# Altium PCB IntelliModule-Alpha.PcbDoc (part 1 of 2)
Units mm, origin at the board's own origin, x right, y up, seen from the top; angles counter-clockwise.
Board outline 30 x 26.8 mm, 4 copper layers (Top Layer, Layer 1, Layer 2, Bottom Layer), stack 1.006 mm thick; 64 components, 69 nets, 256 pads, 140 vias.
Unrouted connection lines stored in the file: 2.
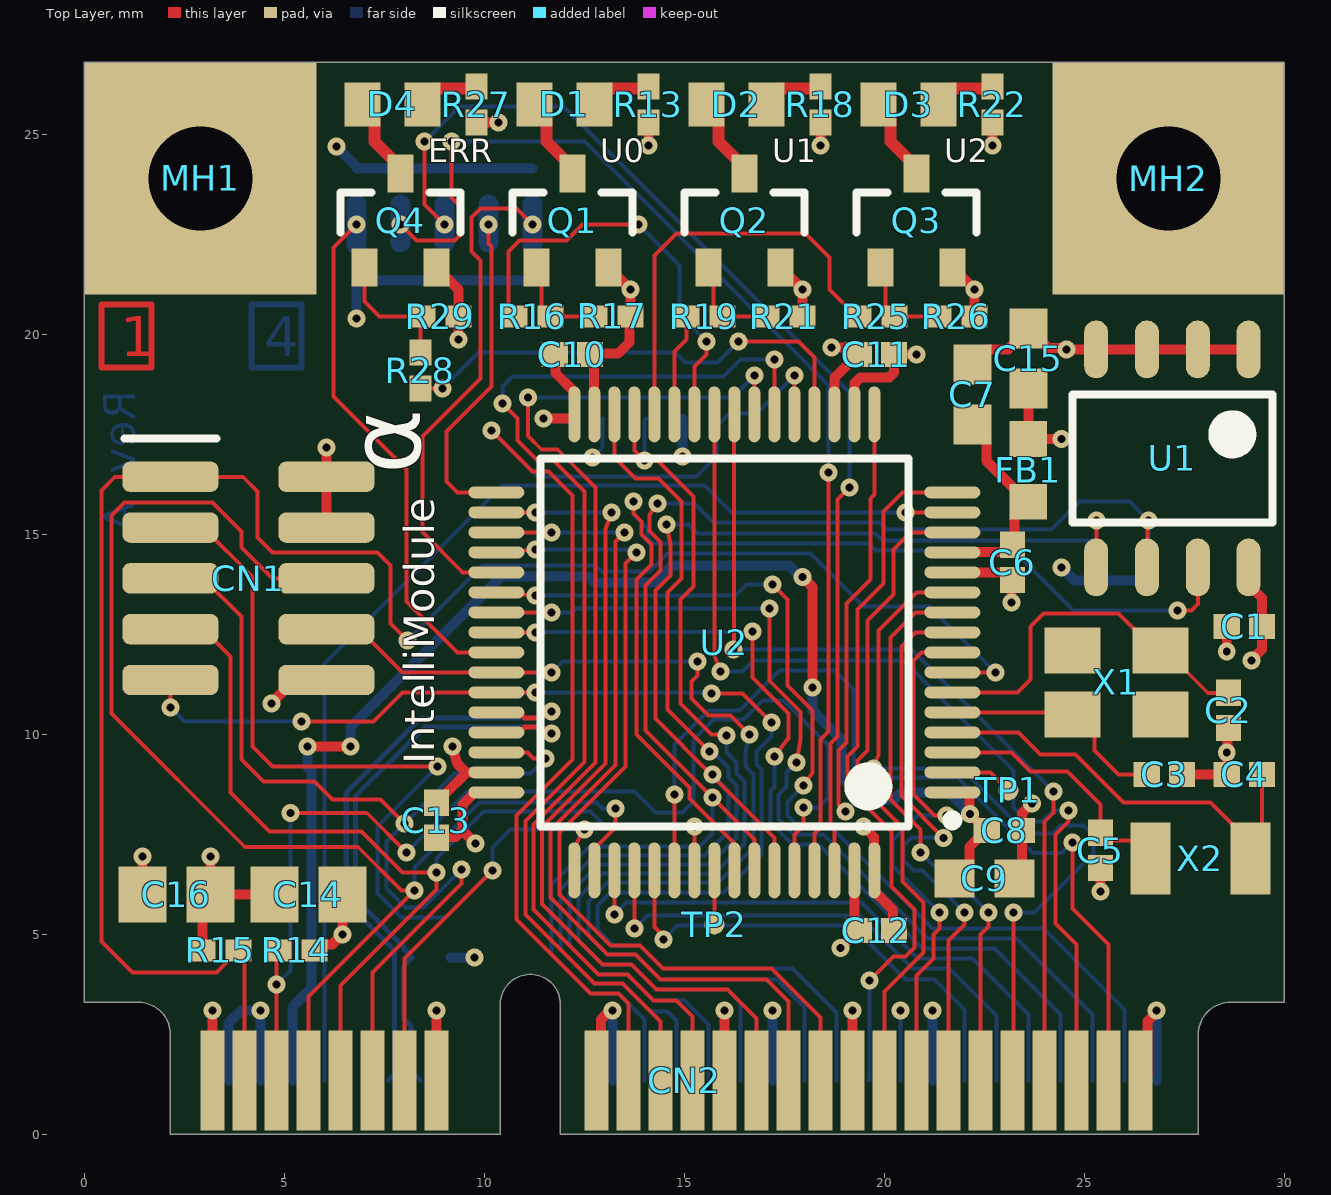
[diagram p0: Top Layer view]
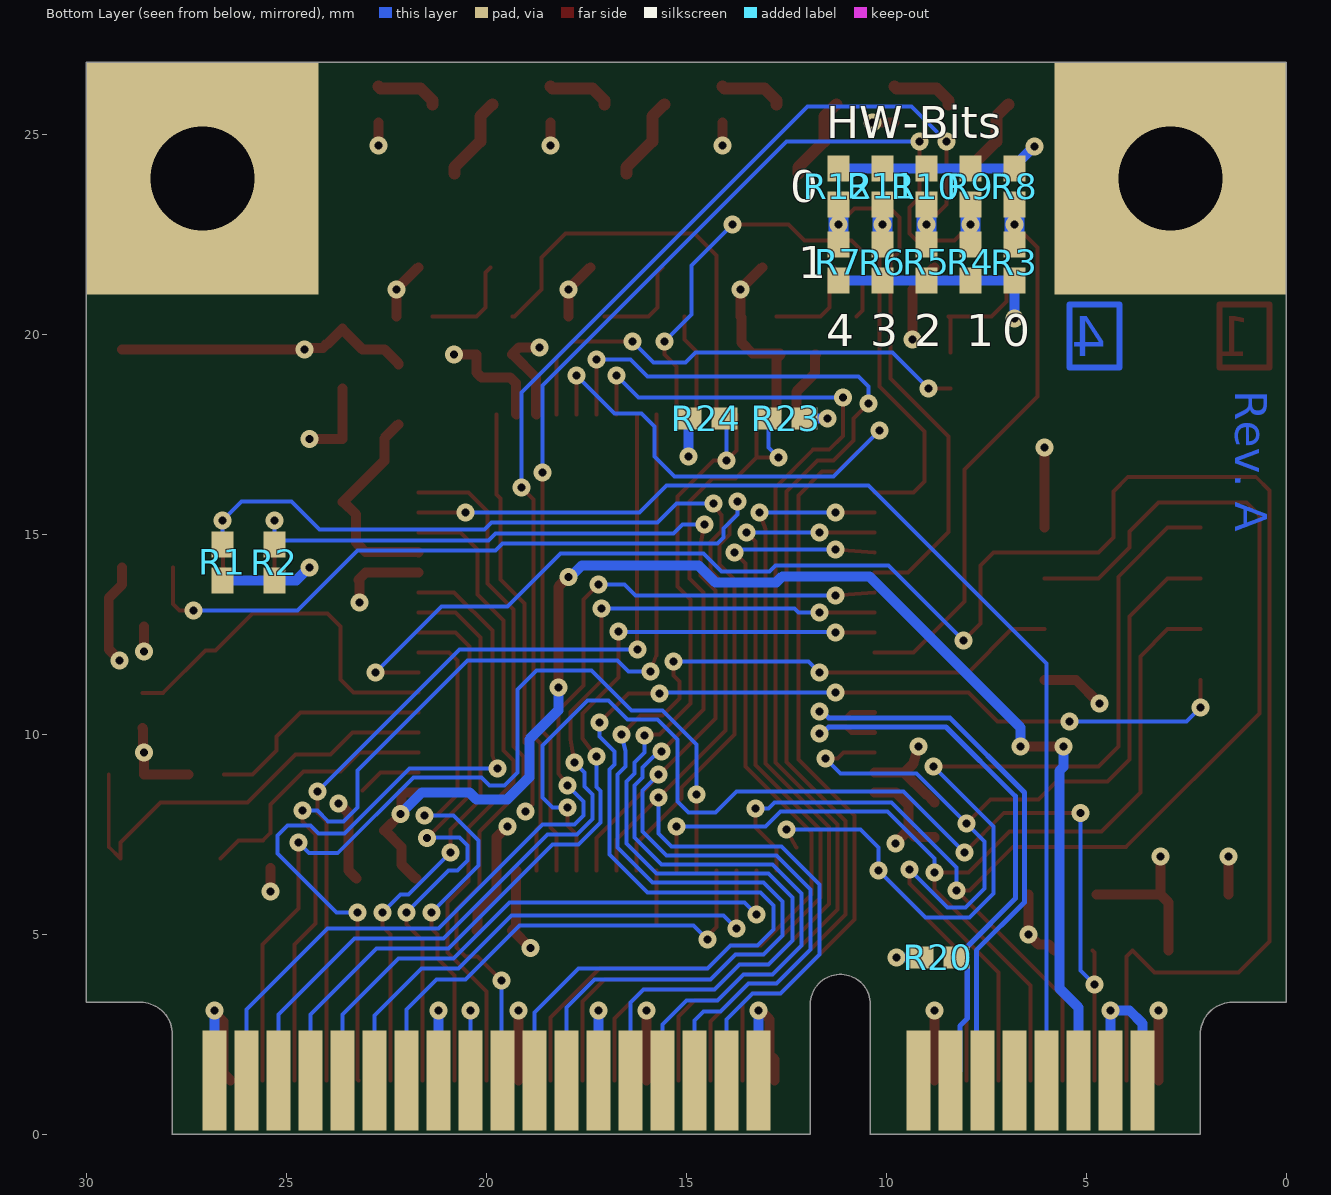
[diagram p1: Bottom Layer view, seen from below]
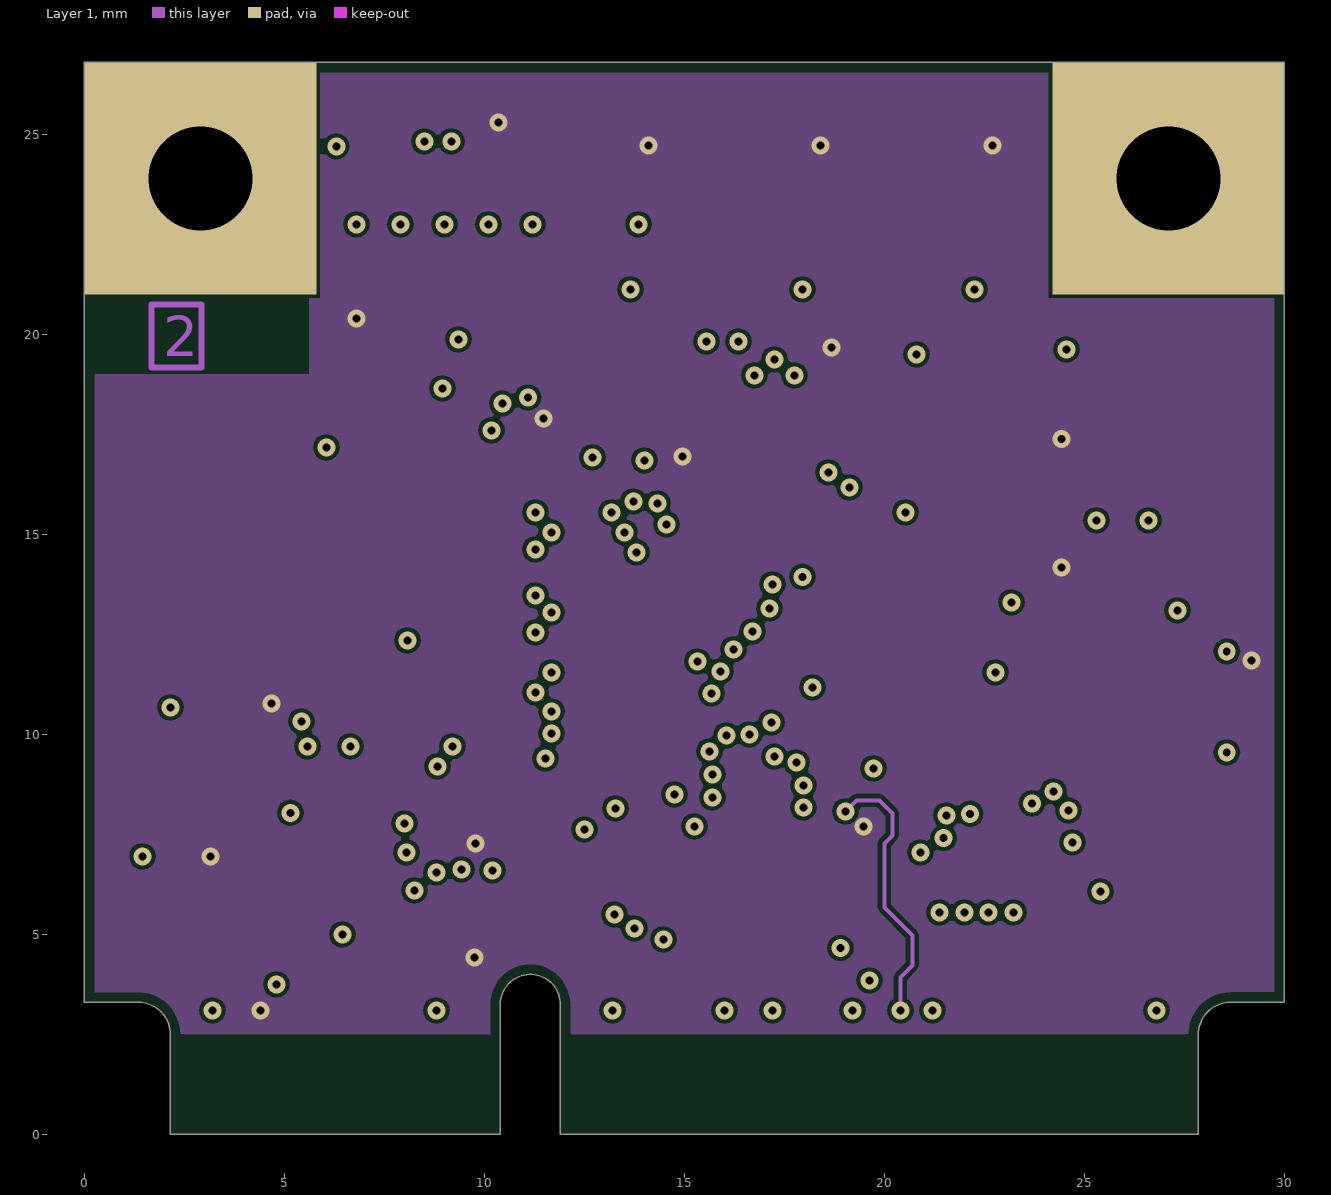
[diagram p2: Layer 1]
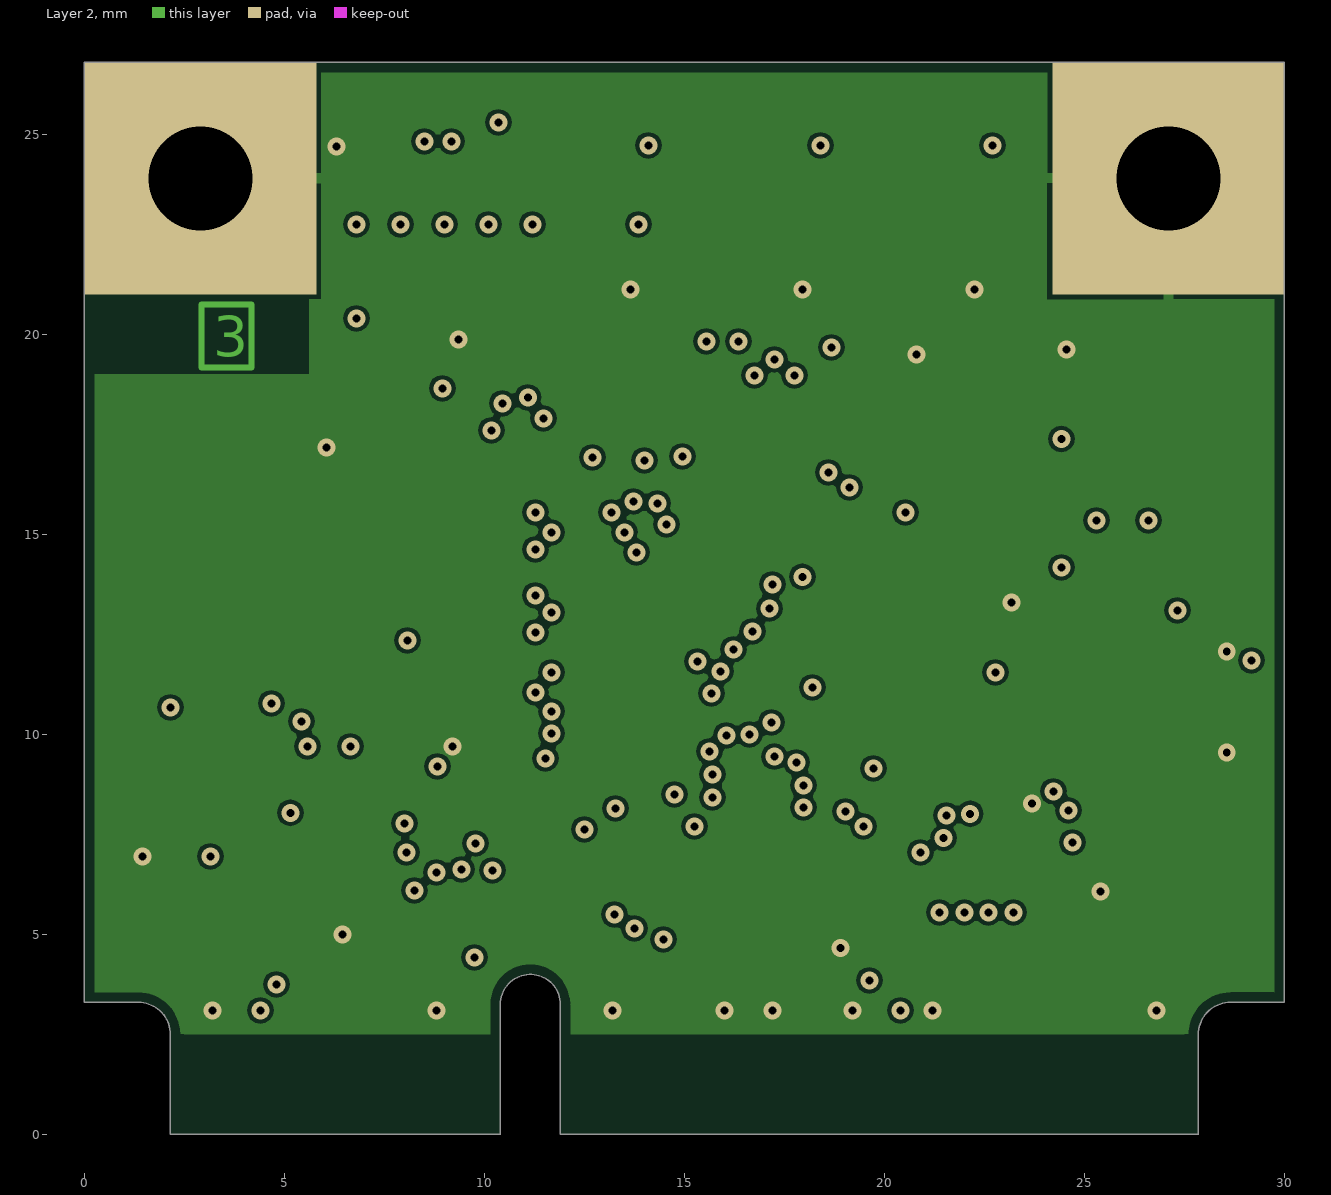
[diagram p3: Layer 2]
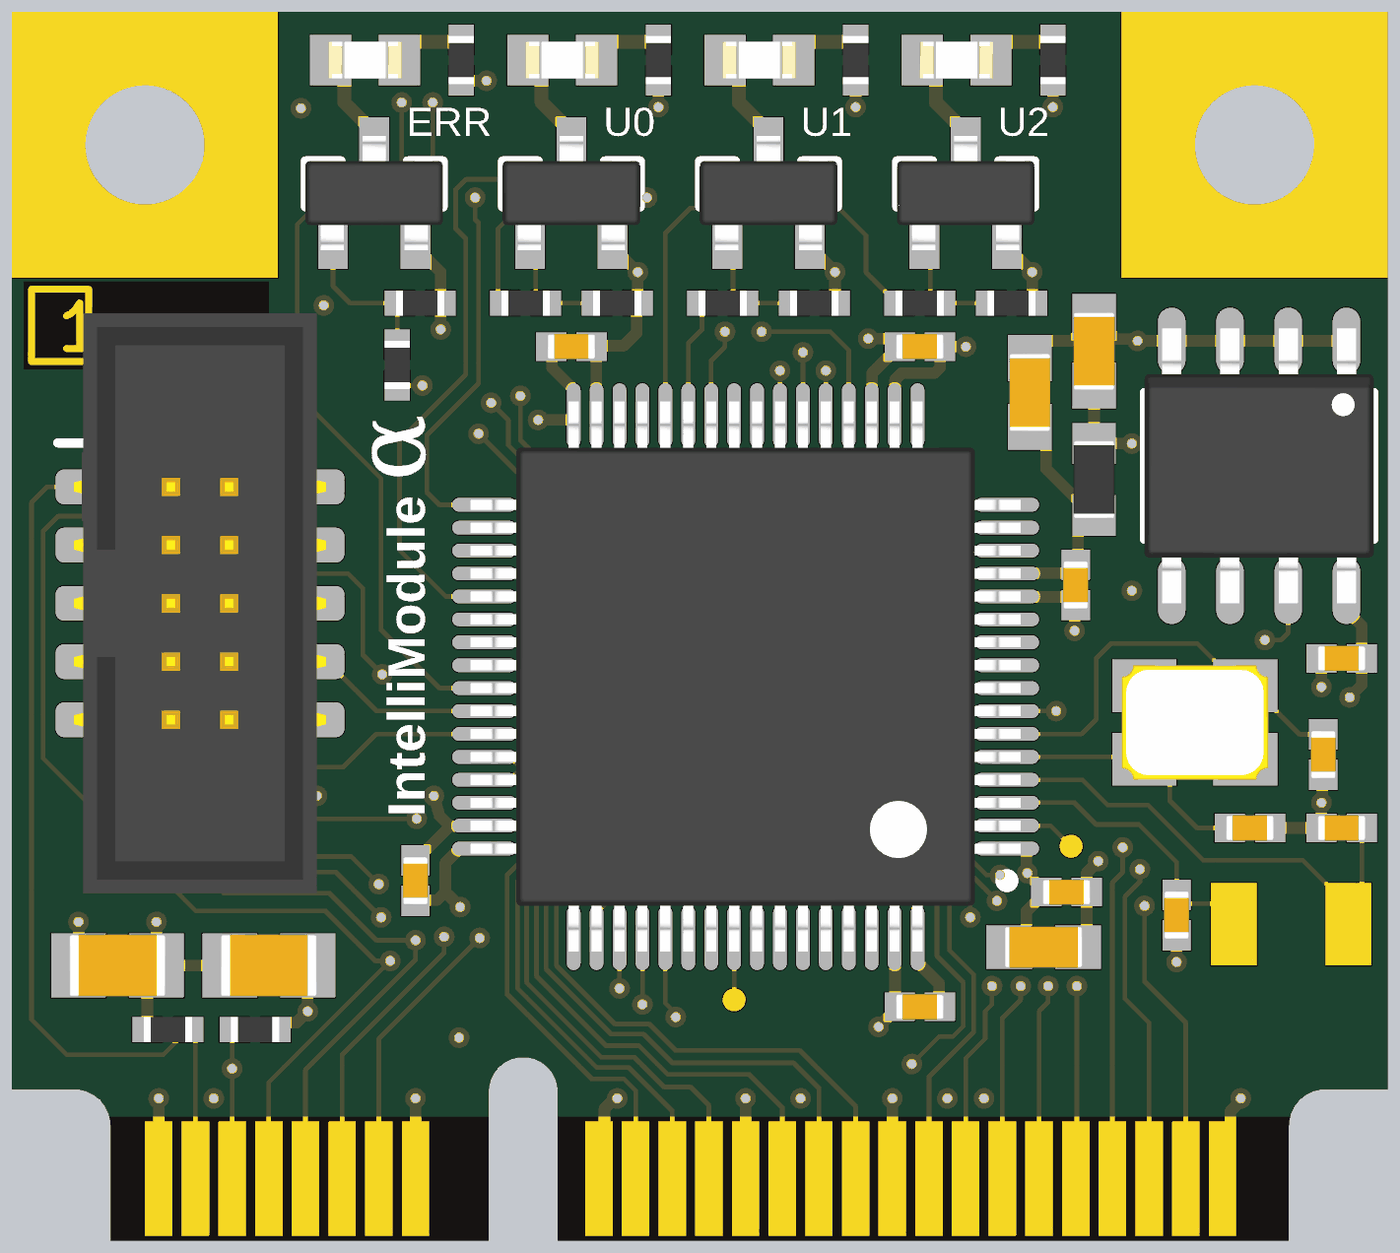
[diagram p4: 3D render of the assembled board from above, using the file's embedded part models]
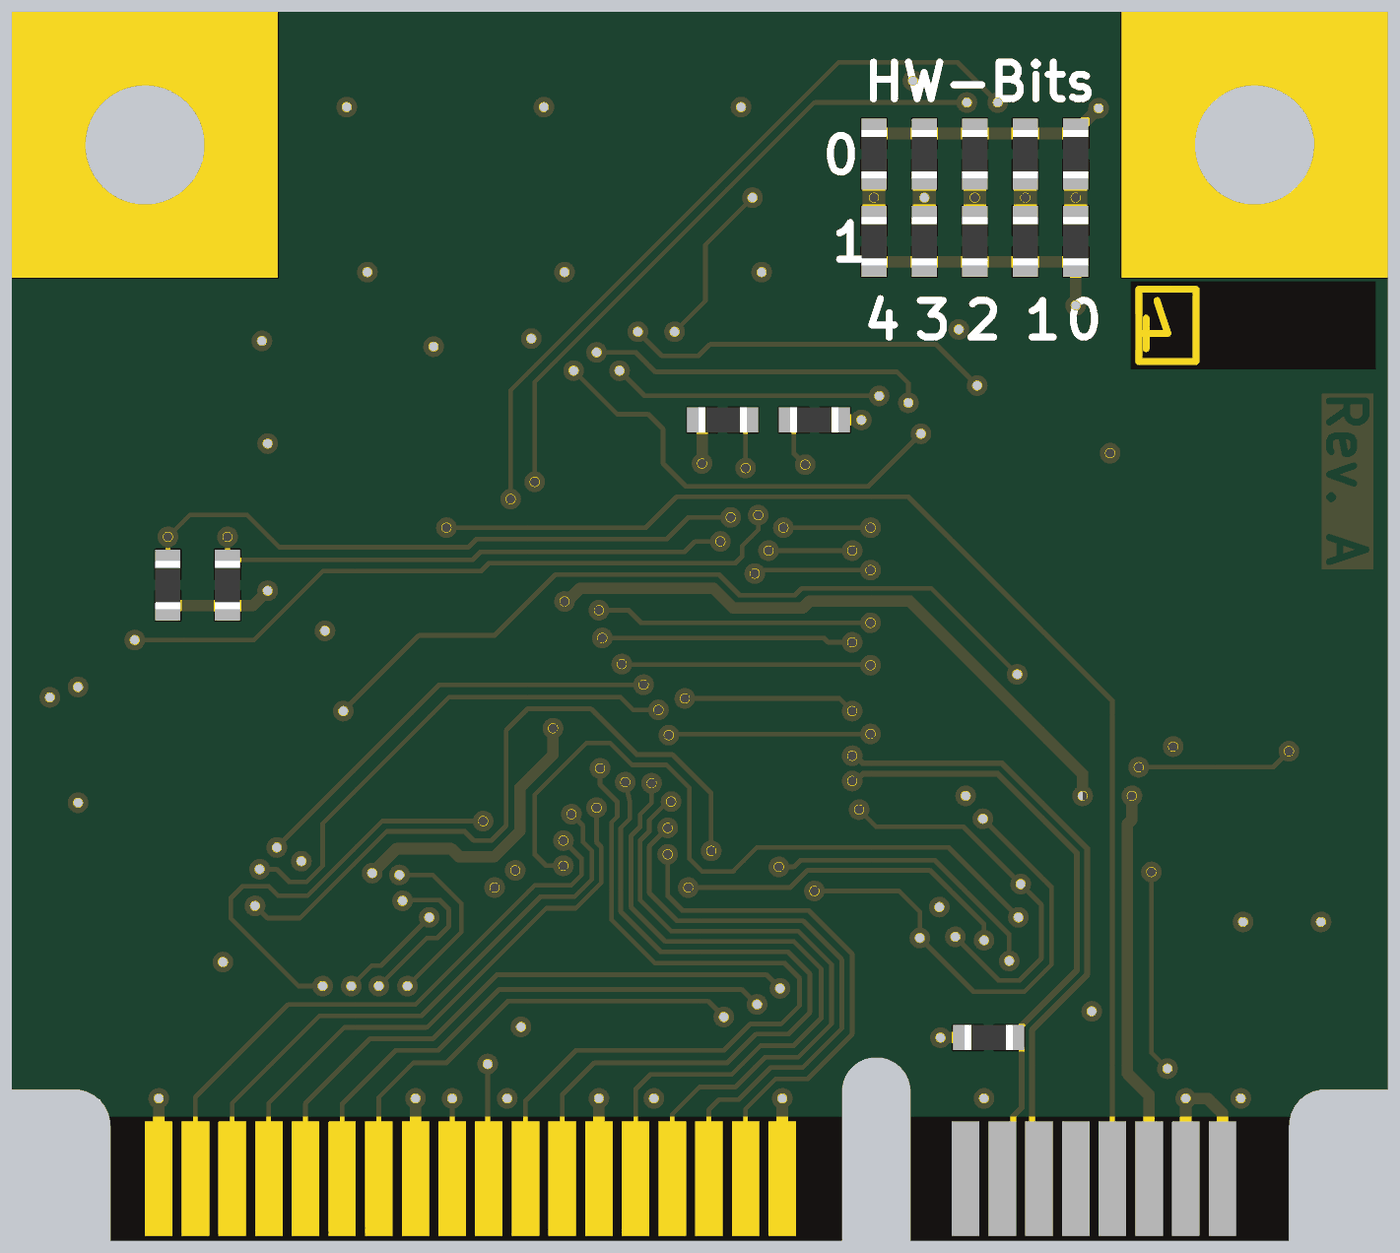
[diagram p5: 3D render of the assembled board from below, using the file's embedded part models]

## Layer stack, top to bottom
Top Solder: solder mask 0.0102, Solder Resist, Dk 3.5
Top Layer: signal copper 0.0356
2313: prepreg 0.1, 2313-Prepreg, Dk 4.05
Layer 1: signal copper 0.035
Dielectric 1: dielectric 0.665, FR-4, Dk 4.8
Layer 2: signal copper 0.035
Dielectric 3: prepreg 0.1, 2313-Prepreg, Dk 4.05
Bottom Layer: signal copper 0.0356
Bottom Solder: solder mask 0.0102, Solder Resist, Dk 3.5

## Board outline
2.15,0 2.15,2.5 ccw(c1.35,2.5) 1.35,3.3 0,3.3 0,26.8 30,26.8 30,3.3 28.65,3.3 ccw(c28.65,2.5) 27.85,2.5 27.85,0 11.9,0 11.9,3.25 ccw(c11.15,3.25) 10.4,3.25 10.4,0

## Design rules (kind name [scope] priority, off if disabled: settings)
BoardOutlineClearance [All] p1: gap=0 ignorepadtopadclearanceinfootprint=FALSE except(0.25: Poly-OutlineEdge Poly-CavityEdge Poly-CutoutEdge Poly-SplitBarrior)
Clearance [All] p1: gap=0.1 ignorepadtopadclearanceinfootprint=FALSE
ComponentClearance [All] p1: gap=0 collisioncheckmode=3 verticalgap=0 showdistances=FALSE
DiffPairsRouting [InDifferentialPairClass('DIFF90')] p1: maxlimit=0.127 minlimit=0.1 mostfreqgap=0.127 toplayer_maxgap=0.1 toplayer_prefgap=0.1 toplayer_minwidth=0.127 toplayer_maxwidth=0.127 toplayer_prefwidth=0.127 midlayer1_mingap=0.127 midlayer1_minwidth=0.068 midlayer1_maxwidth=0.068 midlayer1_prefwidth=0.068 midlayer2_mingap=0.127 midlayer2_minwidth=0.068 midlayer2_maxwidth=0.068 midlayer2_prefwidth=0.068 bottomlayer_maxgap=0.1 bottomlayer_prefgap=0.1 bottomlayer_minwidth=0.127 bottomlayer_maxwidth=0.127 bottomlayer_prefwidth=0.127 impedanceprofiledriven=TRUE impedanceprofileid={2BAF7BB7-BABA-43A1-8F60-9846DA75D675} maxuncoupledlength=12.7
HoleSize [All] p1: absolutevalues=TRUE maxlimit=6.3 minlimit=0.2 maxpercent=80.000 minpercent=20.000
HoleToHoleClearance [All] p1: gap=0.3 allowstackedmicrovias=TRUE
MinimumSolderMaskSliver [All] p1: minsoldermaskwidth=0.1
PlaneClearance [All] p1: clearance=0.1
PolygonConnect [All] p1: thpad.connectstyle=Relief thpad.reliefconductorwidth=0.254 thpad.reliefentries=4 thpad.polygonreliefangle="90 Angle" thpad.airgapwidth=0.125 smdpad.connectstyle=Relief smdpad.reliefconductorwidth=0.254 smdpad.reliefentries=4 smdpad.polygonreliefangle="90 Angle" smdpad.airgapwidth=0.125 via.connectstyle=Direct via.reliefconductorwidth=0.254 via.reliefentries=4 via.polygonreliefangle="90 Angle" via.airgapwidth=0.254
RoutingVias [All] p1: holewidth=0.2 width=0.45 viastyle="Through Hole" minholewidth=0.2 minwidth=0.45 maxholewidth=6.3 maxwidth=10
SilkToSilkClearance [All] p1: silktosilkclearance=0.05
SilkToSolderMaskClearance [IsPad] p1: minsilkscreentomaskgap=0.1 clearancetoexposedcopper=TRUE
SolderMaskExpansion [All] p1: expansion=0.025
Width "Power Width" [InNetClass('Power')] p1: maxlimit=10 minlimit=0.1 preferedwidth=0.25
Width [All] p2: maxlimit=5 minlimit=0.1 preferedwidth=0.1
22 further rules are at their usual default settings.

## Classes and differential pairs
net class Power: 3V3 3V3_VDDA_MCU GND VBAT_MCU
differential pair class DIFF90: MCU_USB_D
differential pair MCU_USB_D: +MCU_USB_D_P -MCU_USB_D_N

## Components (designator, comment, footprint, x,y, rotation, side; value= is the part's Value field where it differs from the comment)
C1 "100nF 16V" CAP-SMD-0402-0.55MM-IPC-MED 29,12.7 r180 top
C2 "18pF 50V" CAP-SMD-0402-0.55MM-IPC-MED 28.6,10.6 r270 top
C3 "18pF 50V" CAP-SMD-0402-0.55MM-IPC-MED 27,9 r0 top
C4 "22pF 50V" CAP-SMD-0402-0.55MM-IPC-MED 29,9 r180 top
C5 "22pF 50V" CAP-SMD-0402-0.55MM-IPC-MED 25.4,7.1 r270 top
C6 "100nF 16V" CAP-SMD-0402-0.55MM-IPC-MED 23.2,14.3 r270 top
C7 "1uF 16V" CAP-SMD-0603-0.9MM-IPC-MED 22.2,18.5 r90 top
C8 "100nF 16V" CAP-SMD-0402-0.55MM-IPC-MED 23,7.6 r0 top
C9 "1uF 16V" CAP-SMD-0603-0.9MM-IPC-MED 22.5,6.4 r0 top
C10 "100nF 16V" CAP-SMD-0402-0.55MM-IPC-MED 12.2,19.5 r0 top
C11 "100nF 16V" CAP-SMD-0402-0.55MM-IPC-MED 19.8,19.5 r0 top
C12 "100nF 16V" CAP-SMD-0402-0.55MM-IPC-MED 19.8,5.1 r180 top
C13 "100nF 16V" CAP-SMD-0402-0.55MM-IPC-MED 8.8,7.85 r90 top
C14 "10uF 10V" CAP-SMD-0805-1.35MM-IPC-MED 5.6,6 r0 top
C15 "1uF 16V" CAP-SMD-0603-0.9MM-IPC-MED 23.6,19.4 r90 top
C16 "10uF 10V" CAP-SMD-0805-1.35MM-IPC-MED 2.3,6 r180 top
CN1 "3220-10-0300-00" CON-SMD-PINHEADER-SHIELDED-1.27MM-10POS-2X5-3220-10-0300-00-CNC-TECH 4.1,13.9 r270 top
CN2 "PCB-EDGE PCIE MINI" CON-PCB-EDGE-PCIE-MINI-CARD-52POS 11.15,0 r0 top
D1 "150060VS75000" LED-SMD-0603 12,25.75 r0 top
D2 "150060VS75000" LED-SMD-0603 16.3,25.75 r0 top
D3 "150060VS75000" LED-SMD-0603 20.6,25.75 r0 top
D4 "150060SS75000" LED-SMD-0603 7.7,25.75 r0 top
FB1 "600R-100MHz 500MA" IND-SMD-0603-0.75MM-IPC-MED 23.6,16.6 r270 top
MH1 "PCIe Mini Card Hole 1" MECH-HOLE-PTH-2.6MM-5.8MMSQ-PCIEMINI 2.9,23.9 r0 top
MH2 "PCIe Mini Card Hole 2" MECH-HOLE-PTH-2.6MM-5.8MMSQ-PCIEMINI 27.1,23.9 r0 top
Q1 "DMN65D8L-7" SOT-23-3-H1.1MM-DIODES-INC 12.2,22.85 r90 top
Q2 "DMN65D8L-7" SOT-23-3-H1.1MM-DIODES-INC 16.5,22.85 r90 top
Q3 "DMN65D8L-7" SOT-23-3-H1.1MM-DIODES-INC 20.8,22.85 r90 top
Q4 "DMN65D8L-7" SOT-23-3-H1.1MM-DIODES-INC 7.9,22.85 r90 top
R1 "1.5kR 1%" RES-SMD-0402-0.4MM-IPC-MED 26.6,14.3 r90 bottom
R2 "1.5kR 1%" RES-SMD-0402-0.4MM-IPC-MED 25.3,14.3 r90 bottom
R3 "10kR 1%" RES-SMD-0402-0.4MM-IPC-MED 6.8,21.8 r90 bottom
R4 "10kR 1%" RES-SMD-0402-0.4MM-IPC-MED 7.9,21.8 r90 bottom
R5 "10kR 1%" RES-SMD-0402-0.4MM-IPC-MED 9,21.8 r90 bottom
R6 "10kR 1%" RES-SMD-0402-0.4MM-IPC-MED 10.1,21.8 r90 bottom
R7 "10kR 1%" RES-SMD-0402-0.4MM-IPC-MED 11.2,21.8 r90 bottom
R8 "10kR 1%" RES-SMD-0402-0.4MM-IPC-MED 6.8,23.7 r90 bottom
R9 "10kR 1%" RES-SMD-0402-0.4MM-IPC-MED 7.9,23.7 r90 bottom
R10 "10kR 1%" RES-SMD-0402-0.4MM-IPC-MED 9,23.7 r90 bottom
R11 "10kR 1%" RES-SMD-0402-0.4MM-IPC-MED 10.1,23.7 r90 bottom
R12 "10kR 1%" RES-SMD-0402-0.4MM-IPC-MED 11.2,23.7 r90 bottom
R13 "240R 1%" RES-SMD-0402-0.4MM-IPC-MED 14.1,25.75 r90 top
R14 "10kR 1%" RES-SMD-0402-0.4MM-IPC-MED 5.3,4.6 r180 top
R15 "10kR 1%" RES-SMD-0402-0.4MM-IPC-MED 3.4,4.6 r0 top
R16 "33R 1%" RES-SMD-0402-0.4MM-IPC-MED 11.2,20.45 r0 top
R17 "10kR 1%" RES-SMD-0402-0.4MM-IPC-MED 13.2,20.45 r0 top
R18 "240R 1%" RES-SMD-0402-0.4MM-IPC-MED 18.4,25.75 r90 top
R19 "33R 1%" RES-SMD-0402-0.4MM-IPC-MED 15.5,20.45 r0 top
R20 "1.5kR 1%" RES-SMD-0402-0.4MM-IPC-MED 8.7,4.425 r180 bottom
R21 "10kR 1%" RES-SMD-0402-0.4MM-IPC-MED 17.5,20.45 r0 top
R22 "240R 1%" RES-SMD-0402-0.4MM-IPC-MED 22.7,25.75 r90 top
R23 "1.5kR 1%" RES-SMD-0402-0.4MM-IPC-MED 12.5,17.9 r0 bottom
R24 "1.5kR 1%" RES-SMD-0402-0.4MM-IPC-MED 14.5,17.9 r180 bottom
R25 "33R 1%" RES-SMD-0402-0.4MM-IPC-MED 19.8,20.45 r0 top
R26 "10kR 1%" RES-SMD-0402-0.4MM-IPC-MED 21.8,20.45 r0 top
R27 "240R 1%" RES-SMD-0402-0.4MM-IPC-MED 9.8,25.75 r90 top
R28 "33R 1%" RES-SMD-0402-0.4MM-IPC-MED 8.4,19.1 r90 top
R29 "10kR 1%" RES-SMD-0402-0.4MM-IPC-MED 8.9,20.45 r0 top
TP1 "RTC_TAMPER" TP-SMD-CIRCULAR-0.5MM 23.1,8.6 r90 top
TP2 "JTRSTN" TP-SMD-CIRCULAR-0.5MM 15.75,5.25 r90 top
U1 "CAT24C512WI-GT3" SOIC-8-H1.75MM-P1.27MM-ONSEMI 27.2,16.9 r270 top
U2 "STM32F103RCT6TR" LQFP-64-10X10MM-H1.6MM-P0.5MM-ST 16,12.3 r180 top
X1 "16MHz 9pF" XTAL-SMD-4-SMD-3.2X2.5MM 25.8,11.3 r0 top
X2 "32.768kHz 12.5pF" XTAL-SMD-2-SMD-3.2X1.5MM 27.9,6.9 r0 top

## Footprints (in the part's own frame and the unit in brackets; to place one, negate y for a bottom-side part, rotate by r counter-clockwise, add the part's x,y. Pads: shape width x height; smd on the part's side, far side on the other; paste and mask are expansions set on the pad)
CAP-SMD-0402-0.55MM-IPC-MED [mm] "0402 Capacitor, 0.55mm Height, IPC Medium Density"
  rect 0.66x0.62 smd: 1(-0.44,0) 2(0.44,0)
  body extent -0.53,-0.28 0.53,0.28, height 0.55
CAP-SMD-0603-0.9MM-IPC-MED [mm] "0603 Capacitor, 0.9mm Height, IPC Medium Density"
  rect 1x0.95 smd: 1(-0.75,0) 2(0.75,0)
  body extent -0.85,-0.45 0.85,0.45, height 0.9
CAP-SMD-0805-1.35MM-IPC-MED [mm] "0805 Capacitor, 1.35mm Height, IPC Medium Density"
  rect 1.2x1.4 smd: 1(-0.85,0) 2(0.85,0)
  body extent -1.05,-0.67 1.05,0.67, height 1.35
CON-PCB-EDGE-PCIE-MINI-CARD-52POS [mm]
  rect 0.6x2.5 smd paste-5: 1(-7.95,1.35) 3(-7.15,1.35) 5(-6.35,1.35) 7(-5.55,1.35) 9(-4.75,1.35) 11(-3.95,1.35) 13(-3.15,1.35) 15(-2.35,1.35) 17(1.65,1.35) 19(2.45,1.35) 21(3.25,1.35) 23(4.05,1.35) 25(4.85,1.35) 27(5.65,1.35) 29(6.45,1.35) 31(7.25,1.35) 33(8.05,1.35) 35(8.85,1.35) 37(9.65,1.35) 39(10.45,1.35) 41(11.25,1.35) 43(12.05,1.35) 45(12.85,1.35) 47(13.65,1.35) 49(14.45,1.35) 51(15.25,1.35)
  rect 0.6x2.5 smd far side: 2(-7.55,1.35) 4(-6.75,1.35) 6(-5.95,1.35) 8(-5.15,1.35) 10(-4.35,1.35) 12(-3.55,1.35) 14(-2.75,1.35) 16(-1.95,1.35)
  rect 0.6x2.5 smd far side paste-5: 18(2.05,1.35) 20(2.85,1.35) 22(3.65,1.35) 24(4.45,1.35) 26(5.25,1.35) 28(6.05,1.35) 30(6.85,1.35) 32(7.65,1.35) 34(8.45,1.35) 36(9.25,1.35) 38(10.05,1.35) 40(10.85,1.35) 42(11.65,1.35) 44(12.45,1.35) 46(13.25,1.35) 48(14.05,1.35) 50(14.85,1.35) 52(15.65,1.35)
CON-SMD-PINHEADER-SHIELDED-1.27MM-10POS-2X5-3220-10-0300-00-CNC-TECH [mm] "3220-10-0300-00 2X5 1.27mm Pinheader SMD Connector, CNC Tech"
  rrect50% 0.76x2.4 smd: 1(-2.54,-1.95) 2(-2.54,1.95) 3(-1.27,-1.95) 4(-1.27,1.95) 5(0,-1.95) 6(0,1.95) 7(1.27,-1.95) 8(1.27,1.95) 9(2.54,-1.95) 10(2.54,1.95)
  body extent -6.32,-2.75 6.33,2.75, height 5.6
IND-SMD-0603-0.75MM-IPC-MED [mm] "0603 Inductor, 0.75mm Height, IPC Medium Density"
  rect 0.89x0.94 smd: 1(-0.785,0) 2(0.785,0)
  body extent -0.85,-0.45 0.85,0.45, height 0.75
LED-SMD-0603 [mm] "0603 SMD LED"
  rect 0.9x1.1 smd: 1(-0.75,0) 2(0.75,0)
  body extent -0.8,-0.4 0.8,0.4, height 1.1
LQFP-64-10X10MM-H1.6MM-P0.5MM-ST [mm]
  oval 1.4x0.3 smd: 1(-5.7,3.75) 2(-5.7,3.25) 3(-5.7,2.75) 4(-5.7,2.25) 5(-5.7,1.75) 6(-5.7,1.25) 7(-5.7,0.75) 8(-5.7,0.25) 9(-5.7,-0.25) 10(-5.7,-0.75) 11(-5.7,-1.25) 12(-5.7,-1.75) 13(-5.7,-2.25) 14(-5.7,-2.75) 15(-5.7,-3.25) 16(-5.7,-3.75) 33(5.7,-3.75) 34(5.7,-3.25) 35(5.7,-2.75) 36(5.7,-2.25) 37(5.7,-1.75) 38(5.7,-1.25) 39(5.7,-0.75) 40(5.7,-0.25) 41(5.7,0.25) 42(5.7,0.75) 43(5.7,1.25) 44(5.7,1.75) 45(5.7,2.25) 46(5.7,2.75) 47(5.7,3.25) 48(5.7,3.75)
  oval 0.3x1.4 smd: 17(-3.75,-5.7) 18(-3.25,-5.7) 19(-2.75,-5.7) 20(-2.25,-5.7) 21(-1.75,-5.7) 22(-1.25,-5.7) 23(-0.75,-5.7) 24(-0.25,-5.7) 25(0.25,-5.7) 26(0.75,-5.7) 27(1.25,-5.7) 28(1.75,-5.7) 29(2.25,-5.7) 30(2.75,-5.7) 31(3.25,-5.7) 32(3.75,-5.7) 49(3.75,5.7) 50(3.25,5.7) 51(2.75,5.7) 52(2.25,5.7) 53(1.75,5.7) 54(1.25,5.7) 55(0.75,5.7) 56(0.25,5.7) 57(-0.25,5.7) 58(-0.75,5.7) 59(-1.25,5.7) 60(-1.75,5.7) 61(-2.25,5.7) 62(-2.75,5.7) 63(-3.25,5.7) 64(-3.75,5.7)
  silkscreen extent -5.82,-4.6 4.6,4.6, body extent -6,-6 6,6, height 1.6
MECH-HOLE-PTH-2.6MM-5.8MMSQ-PCIEMINI [mm]
  rect 5.8x5.8 hole 2.6: 1(0,0)
RES-SMD-0402-0.4MM-IPC-MED [mm] "0402 Resistor, 0.4mm Height, IPC Medium Density"
  rect 0.65x0.55 smd: 1(-0.45,0) 2(0.45,0)
  body extent -0.52,-0.28 0.53,0.27, height 0.4
SOIC-8-H1.75MM-P1.27MM-ONSEMI [mm]
  oval 1.45x0.6 smd: 1(-2.725,1.905) 2(-2.725,0.635) 3(-2.725,-0.635) 4(-2.725,-1.905) 5(2.725,-1.905) 6(2.725,-0.635) 7(2.725,0.635) 8(2.725,1.905)
  silkscreen extent -1.6,-2.5 1.6,2.5, body extent -3,-2.5 3,2.5, height 1.75
SOT-23-3-H1.1MM-DIODES-INC [mm]
  rect 0.95x0.65 smd: 1(-1.175,0.9) 2(-1.175,-0.9) 3(1.175,0)
  silkscreen extent -0.3,-1.5 0.7,1.5, body extent -1.25,-1.5 1.25,1.5, height 1.1
TP-SMD-CIRCULAR-0.5MM [mm]
  round 0.5 smd paste-5: 1(0,0)
XTAL-SMD-2-SMD-3.2X1.5MM [mm] "2-SMD 3.2x1.5mm Crystal"
  rect 1x1.8 smd paste-5: 1(-1.25,0) 2(1.25,0)
  body extent -1.6,-0.75 1.6,0.75, height 0.9
XTAL-SMD-4-SMD-3.2X2.5MM [mm] "4-SMD 3.2x2.5mm Crystal"
  rect 1.4x1.15 smd: 1(-1.1,-0.8) 2(1.1,-0.8) 3(1.1,0.8) 4(-1.1,0.8)
  body extent -1.6,-1.25 1.6,1.25, height 0.65

## Part data
C1 C6 C8 C10 C11 C12 C13: library part CL05B104KO5NNNC, "CAP CER 100N 16V X7R 10% SMD 0402 125C SAMSUNG", Capacitance=100nF, Case/Package=0402, Case Code (Metric)=1005, Dielectric=X7R, Internal Part Number=CCER000002, Manufacturer 1=Samsung, Max Operating Temperature=125°C, Min Operating Temperature=-55°C, Package Quantity=1, Supplier Part Number 1=1276-1001-6-ND, Tolerance=10%, Voltage=16V, Case Code (Imperial)=0402, ComponentLink1Description=https://datasheet.ciiva.com/26920/getdatasheetpartid-359683-26920169.pdf?src-supplier=Verical, ComponentLink1URL=https://datasheet.ciiva.com/26920/getdatasheetpartid-359683-26920169.pdf?src-supplier=Verical, ComponentLink2Description=https://datasheet.ciiva.com/29198/458718-da-01-en-vs-kondensator-0402-29198423.pdf?src-supplier=Conrad, ComponentLink2URL=https://datasheet.ciiva.com/29198/458718-da-01-en-vs-kondensator-0402-29198423.pdf?src-supplier=Conrad, ComponentLink3Description=https://datasheet.ciiva.com/16208/cl05b104kq5nnnc-16208343.pdf?src-supplier=Future+Electronics, ComponentLink3URL=https://datasheet.ciiva.com/16208/cl05b104kq5nnnc-16208343.pdf?src-supplier=Future+Electronics, ComponentLink4Description=https://datasheet.ciiva.com/26309/mlcc-catalogdownload2013-eng-26309003.pdf?src-supplier=Distrelec, ComponentLink4URL=https://datasheet.ciiva.com/26309/mlcc-catalogdownload2013-eng-26309003.pdf?src-supplier=Distrelec, Contact Plating=Tin, Depth=0.5mm, Height=0.5mm, Lead Free="Lead Free", Length=1mm, Manufacturer Part Number 1=CL05B104KO5NNNC, Material=Ceramic, Mount="Surface Mount", Packaging="Tape and Reel", Pricing 1="1=0,10000, 10=0,02400, 100=0,01070, 500=0,00766, 1000=0,00602, 2500=0,00548, 5000=0,00504 (USD)", Radiation Hardening=No, RoHS=Yes, Stock 1=53930414, Supplier 1=Digi-Key, Thickness=0.022inch, Voltage Rating=16V, Voltage Rating (DC)=16V, Width=0.02inch
C2 C3: library part CC0402JRNPO9BN180, "CAP CER 18P 50V C0G 5% SMD 0402 125C YAGEO", Capacitance=18pF, Case/Package=0402, Case Code (Metric)=1005, Dielectric=C0G, Internal Part Number=CCER000040, Manufacturer 1=Yageo, Max Operating Temperature=125°C, Min Operating Temperature=-55°C, Package Quantity=1, Supplier Part Number 1=311-1415-1-ND, Temperature Coefficient=30ppm/°C, Tolerance=5%, Voltage=50V, Case Code (Imperial)=0402, ComponentLink1Description=https://datasheet.ciiva.com/11788/0900766b80d84fbf-11788369.pdf?src-supplier=RSComponents, ComponentLink1URL=https://datasheet.ciiva.com/11788/0900766b80d84fbf-11788369.pdf?src-supplier=RSComponents, ComponentLink2Description=https://datasheet.ciiva.com/176/mlccorderingcode-176358.pdf?src-supplier=Digi-Key, ComponentLink2URL=https://datasheet.ciiva.com/176/mlccorderingcode-176358.pdf?src-supplier=Digi-Key, ComponentLink3Description=https://datasheet.ciiva.com/176/mlccorderingcode-176359.pdf?src-supplier=Digi-Key, ComponentLink3URL=https://datasheet.ciiva.com/176/mlccorderingcode-176359.pdf?src-supplier=Digi-Key, ComponentLink4Description=https://datasheet.ciiva.com/11587/upy-gp-np0-16v-to-50v-8-11587087.pdf?src-supplier=Avnet, ComponentLink4URL=https://datasheet.ciiva.com/11587/upy-gp-np0-16v-to-50v-8-11587087.pdf?src-supplier=Avnet, ComponentLink5Description=https://datasheet.ciiva.com/176/mlccorderingcode-176357.pdf?src-supplier=Digi-Key, ComponentLink5URL=https://datasheet.ciiva.com/176/mlccorderingcode-176357.pdf?src-supplier=Digi-Key, ComponentLink6Description=https://datasheet.ciiva.com/28450/1443161-28450232.pdf?src-supplier=Element14, ComponentLink6URL=https://datasheet.ciiva.com/28450/1443161-28450232.pdf?src-supplier=Element14, ComponentLink7Description=https://datasheet.ciiva.com/13208/upy-gp-np0-16v-to-50v-8-13208430.pdf?src-supplier=Mouser, ComponentLink7URL=https://datasheet.ciiva.com/13208/upy-gp-np0-16v-to-50v-8-13208430.pdf?src-supplier=Mouser, Composition=Ceramic, Depth=0.5mm, Height=0.5mm, Lead Free="Lead Free", Length=1mm, Manufacturer Part Number 1=CC0402JRNPO9BN180, Mount="Surface Mount", Number of Pins=2, Packaging="Tape and Reel", Pricing 1="1=0,10000, 10=0,02400, 100=0,01070, 500=0,00764, 1000=0,00601, 2500=0,00546, 5000=0,00502 (USD)", Radiation Hardening=No, REACH SVHC="No SVHC", RoHS=Yes, Stock 1=608594, Supplier 1=Digi-Key, Termination=SMD/SMT, Thickness=0.022inch, Voltage Rating=50V, Voltage Rating (DC)=50V, Weight=2.3E-05oz, Width=0.02inch
C4 C5: library part CL05C220JB5NNNC, "CAP CER 22P 50V C0G 5% SMD 0402 125C SAMSUNG", Capacitance=22pF, Case/Package=0402, Case Code (Metric)=1005, Dielectric=C0G, Internal Part Number=CCER000013, Manufacturer=Samsung, Max Operating Temperature=125°C, Min Operating Temperature=-55°C, Package Quantity=1, Supplier Part Number 1=1276-1116-1-ND, Temperature Coefficient=300ppm/°C, Tolerance=5%, Voltage=50V, Case Code (Imperial)=0402, ComponentLink1Description=https://datasheet.ciiva.com/15195/getdatasheetpartid-358448-15195679.pdf?src-supplier=Verical, ComponentLink1URL=https://datasheet.ciiva.com/15195/getdatasheetpartid-358448-15195679.pdf?src-supplier=Verical, ComponentLink2Description=https://datasheet.ciiva.com/29198/458663-da-01-en-vs-kondensator-0402-29198414.pdf?src-supplier=Conrad, ComponentLink2URL=https://datasheet.ciiva.com/29198/458663-da-01-en-vs-kondensator-0402-29198414.pdf?src-supplier=Conrad, ComponentLink3Description=https://datasheet.ciiva.com/16199/cl05b104kq5nnnc-16199080.pdf?src-supplier=Future+Electronics, ComponentLink3URL=https://datasheet.ciiva.com/16199/cl05b104kq5nnnc-16199080.pdf?src-supplier=Future+Electronics, ComponentLink4Description=https://datasheet.ciiva.com/26309/mlcc-catalogdownload2013-eng-26309032.pdf?src-supplier=Distrelec, ComponentLink4URL=https://datasheet.ciiva.com/26309/mlcc-catalogdownload2013-eng-26309032.pdf?src-supplier=Distrelec, Contact Plating=Tin, Depth=0.5mm, Height=0.5mm, Length=1mm, Manufacturer Part Number=CL05C220JB5NNNC, Material=Ceramic, Mount="Surface Mount", Packaging="Tape and Reel", Pricing 1="1 = 0,10000, 10 = 0,03300, 100 = 0,01480, 500 = 0,01058, 1000 = 0,00831, 2500 = 0,00755, 5000 = 0,00695 (USD)", Radiation Hardening=No, RoHS=Yes, Stock 1=1663917, Supplier 1=Digi-Key, Thickness=0.022inch, Voltage Rating=50V, Width=0.02inch
C7 C9 C15: library part CL10B105KO8NNNC, "CAP CER 1U 16V X7R 10% SMD 0603 125C SAMSUNG", Capacitance=1uF, Case/Package=0603, Case Code (Metric)=1608, Dielectric=X7R, Internal Part Number=CCER000038, Manufacturer 1=Samsung, Max Operating Temperature=125°C, Min Operating Temperature=-55°C, Supplier Part Number 1=1276-1019-1-ND, Tolerance=10%, Voltage=16V, Case Code (Imperial)=0603, ComponentLink1Description=https://datasheet.ciiva.com/15195/getdatasheetpartid-357418-15195728.pdf?src-supplier=Verical, ComponentLink1URL=https://datasheet.ciiva.com/15195/getdatasheetpartid-357418-15195728.pdf?src-supplier=Verical, ComponentLink2Description=https://datasheet.ciiva.com/29198/458176-da-01-en-vs-kondensator-0603-29198478.pdf?src-supplier=Conrad, ComponentLink2URL=https://datasheet.ciiva.com/29198/458176-da-01-en-vs-kondensator-0603-29198478.pdf?src-supplier=Conrad, Depth=0.8mm, Height=0.8mm, Lead Free="Lead Free", Length=1.6mm, Manufacturer Part Number 1=CL10B105KO8NNNC, Material=Ceramic, Mount="Surface Mount", Packaging="Tape and Reel", Pricing 1="1=0,10000, 10=0,05200, 100=0,02320, 500=0,01654, 1000=0,01300 (USD)", Radiation Hardening=No, RoHS=Yes, Stock 1=4308120, Supplier 1=Digi-Key, Thickness=0.035inch, Voltage Rating=16V, Voltage Rating (DC)=16V, Width=0.031inch
C14 C16: library part CL21A106KPFNNNG, "CAP CER 10U 10V X5R 10% SMD 0805 85C SAMSUNG", Capacitance=10uF, Case/Package=0805, Case Code (Metric)=2012, Dielectric=X5R, Internal Part Number=CCER000039, Manufacturer 1=Samsung, Max Operating Temperature=85°C, Min Operating Temperature=-55°C, Package Quantity=3000, Supplier Part Number 1=1276-6456-1-ND, Tolerance=10%, Voltage=10V, Case Code (Imperial)=0805, ComponentLink1Description=https://datasheet.ciiva.com/16428/cl21a106kpfnnng-16428896.pdf?src-supplier=Future+Electronics, ComponentLink1URL=https://datasheet.ciiva.com/16428/cl21a106kpfnnng-16428896.pdf?src-supplier=Future+Electronics, ComponentLink2Description=https://datasheet.ciiva.com/26936/getdatasheetpartid-640497-26936900.pdf?src-supplier=Verical, ComponentLink2URL=https://datasheet.ciiva.com/26936/getdatasheetpartid-640497-26936900.pdf?src-supplier=Verical, Depth=1.25mm, Height=1.25mm, Lead Free="Lead Free", Length=2mm, Manufacturer Part Number 1=CL21A106KPFNNNG, Mount="Surface Mount", Packaging="Tape and Reel", Pricing 1="1=0,14000, 10=0,10000, 100=0,04690, 500=0,03290, 1000=0,02724 (USD)", Radiation Hardening=No, RoHS=Yes, Stock 1=884042, Supplier 1=Digi-Key, Termination=Wraparound, Thickness=0.053inch, Voltage Rating=10V, Width=0.049inch
CN1: "CON PINHDR SMD 1.27MM SHIELDED KEYED CNC TECH 10POS", Internal Part Number=CON000024, Manufacturer 1="CNC Tech", Package Quantity=3200, Supplier Part Number 1=1175-1629-ND, ComponentLink1Description=https://datasheet.ciiva.com/18655/3220-xx-0300-00-18655365.pdf?src-supplier=Digi-Key, ComponentLink1URL=https://datasheet.ciiva.com/18655/3220-xx-0300-00-18655365.pdf?src-supplier=Digi-Key, Connector Type="Male Pin", Contact Plating=Gold, Manufacturer Part Number 1=3220-10-0300-00, Mount="Surface Mount", Number of Positions=10, Number of Rows=2, Packaging=Tray, Pitch=0.05inch, Pricing 1="1=0,74000, 10=0,69000, 100=0,52900, 500=0,46000, 3200=0,34500, 6400=0,33350, 12800=0,30590 (USD)", RoHS=Yes, Row Spacing=0.05inch, Stock 1=107713, Supplier 1=Digi-Key, Termination=Solder
CN2: "PCIE MINI CARD PCB EDGE"
D1 D2 D3: "LED GREEN570NM SMD 0603 2V 20mA 40mcd", Case/Package=0603, Case Code (Metric)=1608, Color=Green, Forward Current=30mA, Forward Voltage=2V, Internal Part Number=LED000005, Manufacturer="Wurth Electronics", Max Operating Temperature=85°C, Min Operating Temperature=-40°C, Package Quantity=1, Supplier Part Number 1=732-4980-1-ND, Test Current=20mA, Case Code (Imperial)=0603, ComponentLink1Description=https://datasheet.ciiva.com/23843/150060vs75000-23843249.pdf?src-supplier=Newark, ComponentLink1URL=https://datasheet.ciiva.com/23843/150060vs75000-23843249.pdf?src-supplier=Newark, ComponentLink2Description=https://datasheet.ciiva.com/29279/759431-da-01-en-chipled-0603-w-kl-h-gruen-150060vs7500-29279199.pdf?src-supplier=Conrad, ComponentLink2URL=https://datasheet.ciiva.com/29279/759431-da-01-en-chipled-0603-w-kl-h-gruen-150060vs7500-29279199.pdf?src-supplier=Conrad, ComponentLink3Description=https://datasheet.ciiva.com/29562/150060vs75000-29562919.pdf?src-supplier=Digi-Key, ComponentLink3URL=https://datasheet.ciiva.com/29562/150060vs75000-29562919.pdf?src-supplier=Digi-Key, ComponentLink4Description=https://datasheet.ciiva.com/29562/150060vs75000-29562920.pdf?src-supplier=Digi-Key, ComponentLink4URL=https://datasheet.ciiva.com/29562/150060vs75000-29562920.pdf?src-supplier=Digi-Key, ComponentLink5Description=https://datasheet.ciiva.com/29562/150060vs75000-29562921.pdf?src-supplier=Digi-Key, ComponentLink5URL=https://datasheet.ciiva.com/29562/150060vs75000-29562921.pdf?src-supplier=Digi-Key, ComponentLink6Description=https://datasheet.ciiva.com/48430/150060vs75000-eng-tds-48430043.pdf?src-supplier=Distrelec, ComponentLink6URL=https://datasheet.ciiva.com/48430/150060vs75000-eng-tds-48430043.pdf?src-supplier=Distrelec, Dominant Wavelength=570nm, Height=0.7mm, Length=1.6mm, Lens Style=Clear,Rectangular, Luminous Intensity=40mcd, Manufacturer Part Number=150060VS75000, Mount="Surface Mount", Number of Pins=2, Packaging="Tape and Reel", Pricing 1="1 = 0,14000, 50 = 0,12900, 100 = 0,11000, 500 = 0,09500 (USD)", REACH SVHC=Unknown, RoHS=Yes, Stock 1=94015, Supplier 1=Digi-Key, Viewing Angle=140°, Wavelength=570nm, Width=0.8mm
D4: "LED RED630NM SMD 0603 1V9 20mA 60mcd", Case/Package=0603, Case Code (Metric)=1608, Color=Red, Forward Current=30mA, Forward Voltage=1.9V, Internal Part Number=LED000006, Manufacturer="Wurth Electronics", Max Operating Temperature=85°C, Min Operating Temperature=-40°C, Package Quantity=4000, Supplier Part Number 1=732-4979-1-ND, Test Current=20mA, Case Code (Imperial)=0603, ComponentLink1Description=https://datasheet.ciiva.com/23843/150060ss75000-23843248.pdf?src-supplier=Newark, ComponentLink1URL=https://datasheet.ciiva.com/23843/150060ss75000-23843248.pdf?src-supplier=Newark, ComponentLink2Description=https://datasheet.ciiva.com/29279/759429-da-01-en-chipled-0603-w-kl-s-rot-150060ss75000-29279208.pdf?src-supplier=Conrad, ComponentLink2URL=https://datasheet.ciiva.com/29279/759429-da-01-en-chipled-0603-w-kl-s-rot-150060ss75000-29279208.pdf?src-supplier=Conrad, ComponentLink3Description=https://datasheet.ciiva.com/48430/150060ss75000-eng-tds-48430042.pdf?src-supplier=Distrelec, ComponentLink3URL=https://datasheet.ciiva.com/48430/150060ss75000-eng-tds-48430042.pdf?src-supplier=Distrelec, Dominant Wavelength=630nm, Height=0.7mm, Length=1.6mm, Lens Style=Clear,Rectangular, Luminous Intensity=60mcd, Manufacturer Part Number=150060SS75000, Mount="Surface Mount", Packaging="Tape and Reel", Pricing 1="1 = 0,14000, 50 = 0,12900, 100 = 0,11000, 500 = 0,09500 (USD)", REACH SVHC=Unknown, RoHS=Yes, Stock 1=15803, Supplier 1=Digi-Key, Viewing Angle=140°, Wavelength=630nm, Width=0.8mm
FB1: library part MMZ1608B601CTAH0, "BEAD 600R@100MHZ 500MA 400mR SMD 0603 FERRITE TDK", Case/Package=0603, Case Code (Metric)=1608, Current Rating=500mA, DC Resistance (DCR)=400mR, Internal Part Number=L000007, Manufacturer 1=TDK, Package Quantity=1, Supplier Part Number 1=445-2166-1-ND, Tolerance=25%, Case Code (Imperial)=0603, ComponentLink1Description=https://datasheet.ciiva.com/46381/714910-46381640.pdf?src-supplier=Element14, ComponentLink1URL=https://datasheet.ciiva.com/46381/714910-46381640.pdf?src-supplier=Element14, ComponentLink2Description=https://datasheet.ciiva.com/46634/beads-commercial-signal-mmz-en-46634744.pdf?src-supplier=Digi-Key, ComponentLink2URL=https://datasheet.ciiva.com/46634/beads-commercial-signal-mmz-en-46634744.pdf?src-supplier=Digi-Key, ComponentLink3Description=https://datasheet.ciiva.com/46634/beads-commercial-signal-mmz-en-46634701.pdf?src-supplier=Digi-Key, ComponentLink3URL=https://datasheet.ciiva.com/46634/beads-commercial-signal-mmz-en-46634701.pdf?src-supplier=Digi-Key, ComponentLink4Description=https://datasheet.ciiva.com/46381/1795294-46381695.pdf?src-supplier=Element14, ComponentLink4URL=https://datasheet.ciiva.com/46381/1795294-46381695.pdf?src-supplier=Element14, Core Material=Ferrite, Depth=0.8mm, Height=0.03inch, Impedance=600R, Length=0.063inch, Manufacturer Part Number 1=MMZ1608B601CTAH0, Max DC Current=500mA, Mount="Surface Mount", Packaging="Cut Tape", Pricing 1="1=0,10000, 10=0,07300, 25=0,06600, 50=0,05940, 100=0,04360, 250=0,03168, 500=0,02904, 1000=0,02508 (USD)", REACH SVHC="No SVHC", RoHS=Yes, Stock 1=181107, Supplier 1=Digi-Key, Width=0.031inch
MH1 MH2: library part MECH-HOLE-PTH-2.6MM-5.8MMSQ-PCIEMINI, "2.6mm Diameter 5.8mm Square Pad Plated Through Hole for PCIe-Mini Cards"
Q1 Q2 Q3 Q4: "TRANSISTOR MOSFET N-CH 60V 310mA 2R SOT-23", Case/Package=SOT-23, Continuous Drain Current (ID)=310mA, Drain to Source Breakdown Voltage=60V, Drain to Source Resistance=2R, Gate to Source Voltage (Vgs)=20V, Input Capacitance=22pF, Internal Part Number=Q000002, Manufacturer=Diodes, Max Operating Temperature=150°C, Max Power Dissipation=370mW, Min Operating Temperature=-55°C, Package Quantity=1, Power Dissipation=540mW, Supplier Part Number 1=DMN65D8L-7DICT-ND, Threshold Voltage=2V, ComponentLink1Description=https://datasheet.ciiva.com/6371/dmn65d8l-6371124.pdf?src-supplier=Digi-Key, ComponentLink1URL=https://datasheet.ciiva.com/6371/dmn65d8l-6371124.pdf?src-supplier=Digi-Key, ComponentLink2Description=https://datasheet.ciiva.com/13058/dmn65d8l-219098-13058455.pdf?src-supplier=Mouser, ComponentLink2URL=https://datasheet.ciiva.com/13058/dmn65d8l-219098-13058455.pdf?src-supplier=Mouser, ComponentLink3Description=https://datasheet.ciiva.com/6371/dmn65d8l-6371126.pdf?src-supplier=Digi-Key, ComponentLink3URL=https://datasheet.ciiva.com/6371/dmn65d8l-6371126.pdf?src-supplier=Digi-Key, ComponentLink4Description=https://datasheet.ciiva.com/6371/dmn65d8l-6371128.pdf?src-supplier=Digi-Key, ComponentLink4URL=https://datasheet.ciiva.com/6371/dmn65d8l-6371128.pdf?src-supplier=Digi-Key, Drain to Source Voltage (Vdss)=60V, Element Configuration=Single, FET Type="1 N-Channel", Height=1.1mm, Lead Free="Lead Free", Length=3mm, Manufacturer Part Number=DMN65D8L-7, Mount="Surface Mount", Number of Channels=1, Number of Elements=1, Number of Pins=3, Packaging="Tape and Reel", Pricing 1="1 = 0,17000, 10 = 0,15400, 100 = 0,08390, 500 = 0,05166, 1000 = 0,03522 (USD)", Rds On Max=3R, REACH SVHC="No SVHC", Rise Time=2.8ns, RoHS=Yes, Stock 1=1242871, Supplier 1=Digi-Key, Turn-Off Delay Time=12.6ns, Turn-On Delay Time=2.7ns, Weight=0.000282oz, Width=1.4mm
R1 R2 R20 R23 R24: library part RC0402FR-071K5L, "RES 1K5 1% 1/16W SMD 0402 YAEGO", Case/Package=0402, Case Code (Metric)=1005, Internal Part Number=R000006, Manufacturer=Yageo, Max Operating Temperature=155°C, Max Power Dissipation=62.5mW, Min Operating Temperature=-55°C, Package Quantity=1, Resistance=1.5kR, Supplier Part Number 1=311-1.50KLRCT-ND, Temperature Coefficient=100ppm/°C, Tolerance=1%, Voltage Rating=50V, Case Code (Imperial)=0402, ComponentLink1Description=https://datasheet.ciiva.com/11808/0900766b80c66297-11808238.pdf?src-supplier=RSComponents, ComponentLink1URL=https://datasheet.ciiva.com/11808/0900766b80c66297-11808238.pdf?src-supplier=RSComponents, ComponentLink2Description=https://datasheet.ciiva.com/2453/pyu-r-int-thick-7-2453440.pdf?src-supplier=Digi-Key, ComponentLink2URL=https://datasheet.ciiva.com/2453/pyu-r-int-thick-7-2453440.pdf?src-supplier=Digi-Key, ComponentLink3Description=https://datasheet.ciiva.com/2453/pyu-r-int-thick-7-2453441.pdf?src-supplier=Digi-Key, ComponentLink3URL=https://datasheet.ciiva.com/2453/pyu-r-int-thick-7-2453441.pdf?src-supplier=Digi-Key, ComponentLink4Description=https://datasheet.ciiva.com/46394/1018594-46394950.pdf?src-supplier=Element14, ComponentLink4URL=https://datasheet.ciiva.com/46394/1018594-46394950.pdf?src-supplier=Element14, ComponentLink5Description=https://datasheet.ciiva.com/7849/1018594-7849864.pdf?src-supplier=Element14, ComponentLink5URL=https://datasheet.ciiva.com/7849/1018594-7849864.pdf?src-supplier=Element14, ComponentLink6Description=https://datasheet.ciiva.com/15189/getdatasheetpartid-323992-15189370.pdf?src-supplier=Verical, ComponentLink6URL=https://datasheet.ciiva.com/15189/getdatasheetpartid-323992-15189370.pdf?src-supplier=Verical, ComponentLink7Description=https://datasheet.ciiva.com/7849/1018594-7849863.pdf?src-supplier=Element14, ComponentLink7URL=https://datasheet.ciiva.com/7849/1018594-7849863.pdf?src-supplier=Element14, ComponentLink8Description=https://datasheet.ciiva.com/12558/pyu-rc0402-51-rohs-l-6-r-8721-12558542.pdf?src-supplier=Mouser, ComponentLink8URL=https://datasheet.ciiva.com/12558/pyu-rc0402-51-rohs-l-6-r-8721-12558542.pdf?src-supplier=Mouser, ComponentLink9Description=https://datasheet.ciiva.com/2453/pyu-r-int-thick-7-2453439.pdf?src-supplier=Digi-Key, ComponentLink9URL=https://datasheet.ciiva.com/2453/pyu-r-int-thick-7-2453439.pdf?src-supplier=Digi-Key, Composition="Thick Film", Depth=0.5mm, Features="Moisture Resistant", Height=0.016inch, Lead Free="Lead Free", Length=1mm, Manufacturer Part Number=RC0402FR-071K5L, Military Standard=Not, Number of Terminations=2, Packaging="Tape and Reel", Power Rating=62.5mW, Pricing 1="1 = 0,10000, 10 = 0,01600, 100 = 0,00640, 1000 = 0,00286, 2500 = 0,00248, 5000 = 0,00205 (USD)", REACH SVHC="No SVHC", RoHS=Yes, Stock 1=9091318, Supplier 1=Digi-Key, Termination=SMD/SMT, Width=0.02inch
R3 R4 R5 R6 R7 R8 R9 R10 R11 R12 R14 R15 R17 R21 R26 R29: library part RC0402FR-0710KL, "RES 10K 1% 1/16W SMD 0402 YAEGO", Case/Package=0402, Case Code (Metric)=1005, Internal Part Number=R000016, Manufacturer=Yageo, Max Operating Temperature=155°C, Min Operating Temperature=-55°C, Package Quantity=10000, Power Rating=62.5mW, Resistance=10kR, Supplier Part Number 1=311-10.0KLRCT-ND, Temperature Coefficient=100ppm/°C, Tolerance=1%, Voltage Rating=50V, Case Code (Imperial)=0402, ComponentLink1Description=https://datasheet.ciiva.com/7660/38568-7660787.pdf?src-supplier=Element14, ComponentLink1URL=https://datasheet.ciiva.com/7660/38568-7660787.pdf?src-supplier=Element14, ComponentLink2Description=https://datasheet.ciiva.com/7849/1784430-7849813.pdf?src-supplier=Element14, ComponentLink2URL=https://datasheet.ciiva.com/7849/1784430-7849813.pdf?src-supplier=Element14, ComponentLink3Description=https://datasheet.ciiva.com/7849/1686128-7849814.pdf?src-supplier=Element14, ComponentLink3URL=https://datasheet.ciiva.com/7849/1686128-7849814.pdf?src-supplier=Element14, ComponentLink4Description=https://datasheet.ciiva.com/7849/1784430-7849815.pdf?src-supplier=Element14, ComponentLink4URL=https://datasheet.ciiva.com/7849/1784430-7849815.pdf?src-supplier=Element14, ComponentLink5Description=https://datasheet.ciiva.com/22747/1018594-22747512.pdf?src-supplier=Element14, ComponentLink5URL=https://datasheet.ciiva.com/22747/1018594-22747512.pdf?src-supplier=Element14, ComponentLink6Description=https://datasheet.ciiva.com/12667/pyu-rc0402-51-rohs-l-6-r-12667067.pdf?src-supplier=Mouser, ComponentLink6URL=https://datasheet.ciiva.com/12667/pyu-rc0402-51-rohs-l-6-r-12667067.pdf?src-supplier=Mouser, ComponentLink7Description=https://datasheet.ciiva.com/7983/1018594-7983486.pdf?src-supplier=Element14, ComponentLink7URL=https://datasheet.ciiva.com/7983/1018594-7983486.pdf?src-supplier=Element14, ComponentLink8Description=https://datasheet.ciiva.com/11819/0900766b80c66297-11819487.pdf?src-supplier=RSComponents, ComponentLink8URL=https://datasheet.ciiva.com/11819/0900766b80c66297-11819487.pdf?src-supplier=RSComponents, ComponentLink9Description=https://datasheet.ciiva.com/15189/getdatasheetpartid-329253-15189431.pdf?src-supplier=Verical, ComponentLink9URL=https://datasheet.ciiva.com/15189/getdatasheetpartid-329253-15189431.pdf?src-supplier=Verical, ComponentLink10Description=https://datasheet.ciiva.com/24070/pyu-rc0402-51-rohs-l-6-r-8721-24070077.pdf?src-supplier=Mouser, ComponentLink10URL=https://datasheet.ciiva.com/24070/pyu-rc0402-51-rohs-l-6-r-8721-24070077.pdf?src-supplier=Mouser, ComponentLink11Description=https://datasheet.ciiva.com/7849/1018594-7849966.pdf?src-supplier=Element14, ComponentLink11URL=https://datasheet.ciiva.com/7849/1018594-7849966.pdf?src-supplier=Element14, ComponentLink12Description=https://datasheet.ciiva.com/7849/1018594-7849967.pdf?src-supplier=Element14, ComponentLink12URL=https://datasheet.ciiva.com/7849/1018594-7849967.pdf?src-supplier=Element14, ComponentLink13Description=https://datasheet.ciiva.com/17070/pyu-rc0402-51-rohs-l-6-r-17070335.pdf?src-supplier=Future+Electronics, ComponentLink13URL=https://datasheet.ciiva.com/17070/pyu-rc0402-51-rohs-l-6-r-17070335.pdf?src-supplier=Future+Electronics, Composition="Thick Film", Depth=0.5mm, Height=0.32mm, Lead Free="Lead Free", Lead Pitch=0.2mm, Length=1mm, Manufacturer Part Number=RC0402FR-0710KL, Military Standard=Not, Number of Pins=2, Number of Terminations=2, Packaging="Tape and Reel", Pricing 1="1 = 0,10000, 10 = 0,01600, 100 = 0,00670, 1000 = 0,00301, 2500 = 0,00261, 5000 = 0,00215 (USD)", REACH SVHC="No SVHC", RoHS=Yes, Stock 1=86154015, Supplier 1=Digi-Key, Termination=SMD/SMT, Voltage Rating (DC)=50V, Width=0.5mm, Working Voltage=50V
R13 R18 R22 R27: library part RC0402FR-07240RL, "RES 240R 1% 1/16W SMD 0402 YAGEO", Case/Package=0402, Internal Part Number=R000043, Manufacturer="Yageo Phycomp", Max Operating Temperature=155°C, Min Operating Temperature=-55°C, Power Rating=62.5mW, Resistance=240R, Supplier Part Number 1=311-240LRCT-ND, Temperature Coefficient=100ppm/°C, Tolerance=1%, Voltage Rating (DC)=50V, ComponentLink1Description=http://www.mouser.com/ds/2/447/PYu-RC0402_51_RoHS_L_6_r-8721.pdf?src-supplier=Mouser, ComponentLink1URL=http://www.mouser.com/ds/2/447/PYu-RC0402_51_RoHS_L_6_r-8721.pdf?src-supplier=Mouser, ComponentLink2Description=http://www.farnell.com/datasheets/2167052.pdf?src-supplier=Farnell, ComponentLink2URL=http://www.farnell.com/datasheets/2167052.pdf?src-supplier=Farnell, ComponentLink3Description=http://www.yageo.com/documents/recent/PYu-RC_Group_51_RoHS_L_9.pdf?src-supplier=Digi-Key, ComponentLink3URL=http://www.yageo.com/documents/recent/PYu-RC_Group_51_RoHS_L_9.pdf?src-supplier=Digi-Key, ComponentLink4Description=http://www.yageo.com/documents/recent/PYu-RC_Group_51_RoHS_L_10.pdf?src-supplier=Digi-Key, ComponentLink4URL=http://www.yageo.com/documents/recent/PYu-RC_Group_51_RoHS_L_10.pdf?src-supplier=Digi-Key, ComponentLink5Description=http://www.farnell.com/datasheets/2167052.pdf?src-supplier=Element14, ComponentLink5URL=http://www.farnell.com/datasheets/2167052.pdf?src-supplier=Element14, Depth=0.5mm, Height=0.32mm, Lead Free="Lead Free", Length=1mm, Manufacturer Part Number=RC0402FR-07240RL, Mount="Surface Mount", Number of Pins=2, Packaging="Cut Tape", Pricing 1="1 = 0,10000, 10 = 0,01600, 100 = 0,00670, 1000 = 0,00301, 2500 = 0,00261, 5000 = 0,00215 (USD)", REACH SVHC="No SVHC", RoHS=Yes, Stock 1=5684518, Supplier 1=Digi-Key
R16 R19 R25 R28: library part RC0402FR-0733RL, "RES 33R 1% 1/16W SMD 0402 YAEGO", Case/Package=0402, Case Code (Metric)=1005, Internal Part Number=R000007, Manufacturer=Yageo, Max Operating Temperature=155°C, Min Operating Temperature=-55°C, Package Quantity=10000, Power Rating=62.5mW, Resistance=33R, Supplier Part Number 1=311-33.0LRCT-ND, Temperature Coefficient=100ppm/°C, Tolerance=1%, Voltage Rating=50V, Case Code (Imperial)=0402, ComponentLink1Description=https://datasheet.ciiva.com/11819/0900766b80c66297-11819487.pdf?src-supplier=RSComponents, ComponentLink1URL=https://datasheet.ciiva.com/11819/0900766b80c66297-11819487.pdf?src-supplier=RSComponents, ComponentLink2Description=https://datasheet.ciiva.com/15189/getdatasheetpartid-329253-15189431.pdf?src-supplier=Verical, ComponentLink2URL=https://datasheet.ciiva.com/15189/getdatasheetpartid-329253-15189431.pdf?src-supplier=Verical, ComponentLink3Description=https://datasheet.ciiva.com/24070/pyu-rc0402-51-rohs-l-6-r-8721-24070077.pdf?src-supplier=Mouser, ComponentLink3URL=https://datasheet.ciiva.com/24070/pyu-rc0402-51-rohs-l-6-r-8721-24070077.pdf?src-supplier=Mouser, ComponentLink4Description=https://datasheet.ciiva.com/7849/1018594-7849966.pdf?src-supplier=Element14, ComponentLink4URL=https://datasheet.ciiva.com/7849/1018594-7849966.pdf?src-supplier=Element14, ComponentLink5Description=https://datasheet.ciiva.com/7849/1018594-7849967.pdf?src-supplier=Element14, ComponentLink5URL=https://datasheet.ciiva.com/7849/1018594-7849967.pdf?src-supplier=Element14, ComponentLink6Description=https://datasheet.ciiva.com/17070/pyu-rc0402-51-rohs-l-6-r-17070335.pdf?src-supplier=Future+Electronics, ComponentLink6URL=https://datasheet.ciiva.com/17070/pyu-rc0402-51-rohs-l-6-r-17070335.pdf?src-supplier=Future+Electronics, Composition="Thick Film", Depth=0.5mm, Height=0.35mm, Lead Free="Lead Free", Length=1mm, Manufacturer Part Number=RC0402FR-0733RL, Military Standard=Not, Number of Pins=2, Packaging="Tape and Reel", Pricing 1="1 = 0,10000, 10 = 0,01600, 100 = 0,00670, 1000 = 0,00301, 2500 = 0,00261, 5000 = 0,00215 (USD)", REACH SVHC=Unknown, RoHS=Yes, Stock 1=6998295, Supplier 1=Digi-Key, Termination=SMD/SMT, Voltage Rating (DC)=50V, Width=0.5mm
TP1 TP2: library part TESTPOINT_CIRCULAR_0.5MM
U1: "IC EEPROM 512KBIT 8BIT WORD I2C 1MHZ SOIC-8", Case/Package=SOIC, Frequency=1MHz, Internal Part Number=IC000050, Manufacturer="ON Semiconductor", Max Frequency=400kHz, Max Operating Temperature=85°C, Max Supply Voltage=5.5V, Min Operating Temperature=-40°C, Min Supply Voltage=1.8V, Nominal Supply Current=2.5mA, Operating Supply Voltage=5V, Package Quantity=1, Supplier Part Number 1=CAT24C512WI-GT3OSCT-ND, Access Time=3500ns, ComponentLink1Description=https://datasheet.ciiva.com/4860/cat24c512-d-109024-4860160.pdf?src-supplier=Mouser, ComponentLink1URL=https://datasheet.ciiva.com/4860/cat24c512-d-109024-4860160.pdf?src-supplier=Mouser, ComponentLink2Description=https://datasheet.ciiva.com/22618/1674429-22618480.pdf?src-supplier=Element14, ComponentLink2URL=https://datasheet.ciiva.com/22618/1674429-22618480.pdf?src-supplier=Element14, ComponentLink3Description=https://datasheet.ciiva.com/25627/0900766b810de298-25627756.pdf?src-supplier=RSComponents, ComponentLink3URL=https://datasheet.ciiva.com/25627/0900766b810de298-25627756.pdf?src-supplier=RSComponents, ComponentLink4Description=https://datasheet.ciiva.com/1906/cat24c512-d-1906881.pdf?src-supplier=Digi-Key, ComponentLink4URL=https://datasheet.ciiva.com/1906/cat24c512-d-1906881.pdf?src-supplier=Digi-Key, ComponentLink5Description=https://datasheet.ciiva.com/3185/cat24c512-d-3185628.pdf?src-supplier=Avnet, ComponentLink5URL=https://datasheet.ciiva.com/3185/cat24c512-d-3185628.pdf?src-supplier=Avnet, ComponentLink6Description=https://datasheet.ciiva.com/9282/cat24c512-d-9282429.pdf?src-supplier=Avnet, ComponentLink6URL=https://datasheet.ciiva.com/9282/cat24c512-d-9282429.pdf?src-supplier=Avnet, ComponentLink7Description=https://datasheet.ciiva.com/16289/cat24c512-d-16289597.pdf?src-supplier=Future+Electronics, ComponentLink7URL=https://datasheet.ciiva.com/16289/cat24c512-d-16289597.pdf?src-supplier=Future+Electronics, ComponentLink8Description=https://datasheet.ciiva.com/1906/cat24c512-d-1906879.pdf?src-supplier=Digi-Key, ComponentLink8URL=https://datasheet.ciiva.com/1906/cat24c512-d-1906879.pdf?src-supplier=Digi-Key, ComponentLink9Description=https://datasheet.ciiva.com/1906/cat24c512-d-1906880.pdf?src-supplier=Digi-Key, ComponentLink9URL=https://datasheet.ciiva.com/1906/cat24c512-d-1906880.pdf?src-supplier=Digi-Key, Contact Plating=Gold, Density=512Kb, Halogen Free="Halogen Free", Height=1.5mm, Interface=I2C,Serial,2-Wire, Lead Free="Lead Free", Length=5mm, Manufacturer Part Number=CAT24C512WI-GT3, Memory Size=512Kb, Memory Type=EEPROM, Mount="Surface Mount", Number of Pins=8, Number of Words=64000, Packaging="Tape and Reel", Pricing 1="1 = 0,57000, 10 = 0,52400, 100 = 0,45980, 500 = 0,44922, 1000 = 0,43301 (USD)", Radiation Hardening=No, REACH SVHC="No SVHC", RoHS=Yes, Stock 1=31510, Supplier 1=Digi-Key, Width=4mm
U2: "IC MCU STM32F103 ARM CORTEX M3 32 BIT 72MHz 256K FLASH 48K RAM LQFP-64", Case/Package=LQFP, Frequency=72MHz, Internal Part Number=IC000049, Manufacturer=STMicroelectronics, Max Operating Temperature=85°C, Max Power Dissipation=444mW, Max Supply Voltage=3.6V, Min Operating Temperature=-40°C, Min Supply Voltage=2V, Package Quantity=1000, Supplier Part Number 1=497-17384-1-ND, ComponentLink1Description=https://datasheet.ciiva.com/26816/stm32f103rct6tr-26816977.pdf?src-supplier=IIIC, ComponentLink1URL=https://datasheet.ciiva.com/26816/stm32f103rct6tr-26816977.pdf?src-supplier=IIIC, ComponentLink2Description=https://datasheet.ciiva.com/1594/cd00191185-1594721.pdf?src-supplier=Digi-Key, ComponentLink2URL=https://datasheet.ciiva.com/1594/cd00191185-1594721.pdf?src-supplier=Digi-Key, Contact Plating=Gold, Core Architecture=ARM, Data Bus Width=32b, Interface=I2C,SPI,USB,CAN,IrDA,UART,USART,LIN, Lead Free="Lead Free", Length=10mm, Manufacturer Part Number=STM32F103RCT6TR, Max Frequency=72MHz, Memory Size=256KB, Memory Type=FLASH, Number of I/Os=51, Number of Pins=64, Number of Programmable I/O=51, Number of Timers/Counters=8, Oscillator Type=Internal, Packaging="Tape and Reel", Peripherals="POR,PWM,WDT,DMA,Temp Sensor,I2C", Pricing 1="1 = 6,37000, 10 = 5,75400, 100 = 4,76350, 500 = 4,14804 (USD)", Radiation Hardening=No, RAM Size=48KB, RoHS=Yes, Stock 1=2139, Supplier 1=Digi-Key, Watchdog Timer=Yes
X1: library part TSX-322516.0000MF18X-AC0, "CRYSTAL 16MHZ 9PF SMD 4-SMD", Case/Package=4-SMD, ESR (Equivalent Series Resistance)=60R, Frequency=16MHz, Frequency Stability=18ppm, Frequency Tolerance=10ppm, Internal Part Number=XTAL000001, Load Capacitance=9pF, Manufacturer 1=Epson, Max Operating Temperature=75°C, Min Operating Temperature=-20°C, Supplier Part Number 1=SER4070CT-ND, ComponentLink1Description=https://www5.epsondevice.com/en/information/support/pdf/june_2018_psc_masterbook.pdf?src-supplier=Digi-Key, ComponentLink1URL=https://www5.epsondevice.com/en/information/support/pdf/june_2018_psc_masterbook.pdf?src-supplier=Digi-Key, ComponentLink2Description=https://www.eea.epson.com/wp-content/uploads/2016/11/November-2016-PCS-MASTER-BOOK.pdf?src-supplier=Verical, ComponentLink2URL=https://www.eea.epson.com/wp-content/uploads/2016/11/November-2016-PCS-MASTER-BOOK.pdf?src-supplier=Verical, ComponentLink3Description=https://www.eea.epson.com/wp-content/uploads/2016/11/November-2016-PCS-MASTER-BOOK.pdf?src-supplier=Mouser, ComponentLink3URL=https://www.eea.epson.com/wp-content/uploads/2016/11/November-2016-PCS-MASTER-BOOK.pdf?src-supplier=Mouser, ComponentLink4Description=https://www.eea.epson.com/wp-content/uploads/2016/11/November-2016-PCS-MASTER-BOOK.pdf?src-supplier=Dove, ComponentLink4URL=https://www.eea.epson.com/wp-content/uploads/2016/11/November-2016-PCS-MASTER-BOOK.pdf?src-supplier=Dove, Height=0.024inch, Length=0.126inch, Manufacturer Part Number 1=TSX-322516.0000MF18X-AC0, Mount="Surface Mount", Packaging="Tape and Reel", Pricing 1="1=0,36000, 10=0,30300, 50=0,27220, 100=0,24200, 500=0,22990 (USD)", RoHS=Yes, Stock 1=11995, Supplier 1=Digi-Key, Width=0.098inch
X2: library part FC-13532.7680KA-A5, "CRYSTAL 32.768KHZ 12.5PF SMD 2-SMD", Case/Package=2-SMD, ESR (Equivalent Series Resistance)=70kR, Frequency=32.768kHz, Frequency Tolerance=20ppm, Internal Part Number=XTAL000005, Load Capacitance=12.5pF, Manufacturer=Epson, Max Operating Temperature=85°C, Min Operating Temperature=-40°C, Supplier Part Number 1=SER4103CT-ND, ComponentLink1Description=https://support.epson.biz/td/api/doc_check.php?dl=brief_FC-135&lang=en&src-supplier=Digi-Key, ComponentLink1URL=https://support.epson.biz/td/api/doc_check.php?dl=brief_FC-135&lang=en&src-supplier=Digi-Key, ComponentLink2Description=https://www.eea.epson.com/wp-content/uploads/2016/11/November-2016-PCS-MASTER-BOOK.pdf?src-supplier=Digi-Key, ComponentLink2URL=https://www.eea.epson.com/wp-content/uploads/2016/11/November-2016-PCS-MASTER-BOOK.pdf?src-supplier=Digi-Key, Height=0.035inch, Length=0.126inch, Manufacturer Part Number=FC-13532.7680KA-A5, Mount="Surface Mount", Number of Pins=2, Packaging="Tape and Reel", Pricing 1="1 = 0,41000, 10 = 0,34400, 50 = 0,30940, 100 = 0,27500, 500 = 0,26126, 1000 = 0,22000 (USD)", RoHS=Yes, Series Resistance=70kR, Stock 1=86519, Supplier 1=Digi-Key, Width=0.061inch

## Via types
v1: diameter 0.45, hole 0.2, Top Layer to Bottom Layer, tented both sides, 140 vias

## Nets (pads, with @x,y where several pads share a name; then routed paths per layer and width w, separated by ;. In a path a pad name is that pad's centre, name@x,y a point inside that pad or via, vN(x,y) a via of type N, cw(c..) or ccw(c..) an arc to the next point about the centre after c; other vN are vias at no path point)
3V3: C1.1 C10.1 C11.1 C12.1 C13.1 C14.1 C15.1 C16.1 CN1.10 CN2.2 CN2.4 FB1.1 R1.1 R2.1 R3.1 R4.1 R5.1 R6.1 R7.1 R13.1 R15.1 R18.1 R20.1 R22.1 R23.1 R24.1 R27.1 U1.8 U2.19 U2.32 U2.48 U2.64 | length 37.3
  Top Layer w0.25: R15.1 2.95,5.8 C16.1 ; v1(3.15,6.95) C16.1 ; v1(4.675,10.775) 5.26,11.36 CN1.10 ; C14.1 C16.1 ; C13.1 8.8,7.43 9.28,7.43 9.45,7.6 ; v1(9.775,7.275) 9.45,7.6 ; R27.1 v1(10.35,25.3) ; U2.48 9.764,8.55 9.45,8.236 9.45,7.6 ; v1(11.475,17.9) 12.227,17.9 12.25,17.923 U2.32 12.25,18.564 11.78,19.034 11.78,19.5 C10.1 ; v1(14.1,24.725) R13.1 ; v1(18.4,24.725) R18.1 ; v1(18.675,19.675) 19.185,19.675 C11.1 19.34,19.5 18.76,18.92 18.76,18.01 U2.19 ; v1(19.475,7.7) 19.74,7.435 19.74,6.61 U2.64 19.75,6.075 20.22,5.605 20.22,5.1 C12.1 ; v1(22.7,24.725) R22.1 ; C15.1 FB1.1 v1(24.425,17.385) ; U1.8 29.105,13.745 29.44,13.41 C1.1 29.44,12.125 29.175,11.86 v1(29.175,11.85)
  Bottom Layer w0.25: CN2.2 3.6,2.775 3.921,3.096 4.396,3.096 v1(4.4,3.1) CN2.4 ; v1(6.8,20.4) R3.1 R4.1 R5.1 R6.1 R7.1 ; R20.1 v1(9.75,4.425) ; v1(11.475,17.9) R23.1 ; v1(14.95,16.95) R24.1 ; v1(24.425,14.175) 24.75,13.85 R2.1 R1.1
3V3_VDDA_MCU: C6.1 C7.1 FB1.2 U2.13 | length 5.3
  Top Layer w0.25: U2.13 21.71,14.56 23.02,14.56 C6.1 23.255,14.795 23.255,15.495 FB1.2@23.575,15.815 ; C7.1 22.55,17.4 22.55,16.84 FB1.2@23.575,15.815 ; FB1.2 FB1.2@23.575,15.815
GND: C1.2 C2.2 C3.2 C4.2 C5.2 C6.2 C7.2 C8.2 C9.2 C10.2 C11.2 C12.2 C13.2 C14.2 C15.2 C16.2 CN1.2 CN1.4 CN2.1 CN2.10 CN2.15 CN2.16 CN2.17 CN2.18 CN2.25 CN2.28 CN2.33 CN2.38 CN2.51 CN2.52 MH1.1 MH2.1 Q1.2 Q2.2 Q3.2 Q4.2 R8.2 R9.2 R10.2 R11.2 R12.2 R14.1 R17.2 R21.2 R26.2 R29.2 U1.1 U1.2 U1.3 U1.4 U2.12 U2.18 U2.31 U2.47 U2.63 | length 60.4